# EAGLE board CT_schematic (EAGLE 7.6.0)

Size 147.92 x 80 mm. Coordinates in mm from the lower left corner, seen from the top.
Outline: 47.92,0 147.92,0 147.92,80 47.92,80 47.92,0
Copper layers (1*16): Top 0.035mm / dielectric 1.5mm / Bottom 0.035mm
Design rules "default": minimum track width 10mil, minimum drill 24mil, track to track 8mil, track to pad 8mil, pad to pad 8mil, via to via 8mil, smd to smd 8mil, copper to edge 40mil, drill to drill 8mil, minimum pad ring 10mil, minimum via ring 8mil, stop-mask expansion 4mil, vias tented up to drill 0mil, thermal gap 10mil

## Footprints (pad centres in the part's own frame; a part is rotated, then mirrored left to right if it is on the bottom)
C0603 = smd 0.8 x 0.8: 1 -0.762,0; 2 0.762,0
C0402 = smd 0.5 x 0.5: 1 -0.508,0; 2 0.508,0
C0805 = smd 1.2 x 1.3: 1 -1.016,0; 2 1.016,0
C1210 = smd 1.2 x 2.5: 1 -1.524,0; 2 1.524,0
EXV-9H = smd 3.505 x 1.676: 1 -2.857,0; 2 2.857,0
PJ-037B_PACKAGE = drill 3.7 square: 1 12,0 | drill 3.2 square: 2 6,0
R0603 = smd 0.8 x 0.8: 1 -0.762,0; 2 0.762,0
WLCSP72 = smd 0.25 x 0.25: A1 -1.597,1.597; A2 -1.201,1.597; A3 -0.794,1.597; A4 -0.397,1.597; A5 0,1.597; A6 0.407,1.597; A7 0.804,1.588; A8 1.201,1.597; A9 1.607,1.597; B1 -1.597,1.201; B2 -1.201,1.201; B3 -0.794,1.201; B4 -0.397,1.201; B5 0,1.201; B6 0.407,1.201; B7 0.804,1.201; B8 1.201,1.201; B9 1.607,1.201; C1 -1.597,0.804; C2 -1.201,0.804; C3 -0.794,0.804; C4 -0.397,0.804; C5 0,0.804; C6 0.407,0.804; C7 0.804,0.804; C8 1.201,0.804; C9 1.607,0.804; D1 -1.597,0.397; D2 -1.201,0.397; D3 -0.794,0.397; D7 0.804,0.397; D8 1.201,0.397; D9 1.607,0.397; E1 -1.597,0; E2 -1.201,0; E3 -0.794,0; E7 0.804,0; E8 1.201,0; E9 1.607,0; F1 -1.597,-0.407; F2 -1.201,-0.407; F3 -0.794,-0.407; F7 0.804,-0.407; F8 1.201,-0.407; F9 1.607,-0.407; G1 -1.597,-0.804; G2 -1.201,-0.804; G3 -0.794,-0.804; G4 -0.397,-0.804; G5 0,-0.804; G6 0.407,-0.804; G7 0.804,-0.804; G8 1.201,-0.804; G9 1.607,-0.804; H1 -1.597,-1.201; H2 -1.201,-1.201; H3 -0.794,-1.201; H4 -0.397,-1.201; H5 0,-1.201; H6 0.407,-1.201; H7 0.804,-1.201; H8 1.201,-1.201; H9 1.607,-1.201; J1 -1.597,-1.607; J2 -1.201,-1.607; J3 -0.794,-1.607; J4 -0.397,-1.607; J5 0,-1.607; J6 0.407,-1.607; J7 0.804,-1.607; J8 1.201,-1.607; J9 1.607,-1.607
SSOP-28 = smd 1.5 x 0.4: 1 -3.625,4.225; 2 -3.625,3.575; 3 -3.625,2.925; 4 -3.625,2.275; 5 -3.625,1.625; 6 -3.625,0.975; 7 -3.625,0.325; 8 -3.625,-0.325; 9 -3.625,-0.975; 10 -3.625,-1.625; 11 -3.625,-2.275; 12 -3.625,-2.925; 13 -3.625,-3.575; 14 -3.625,-4.225; 15 3.625,-4.225; 16 3.625,-3.575; 17 3.625,-2.925; 18 3.625,-2.275; 19 3.625,-1.625; 20 3.625,-0.975; 21 3.625,-0.325; 22 3.625,0.325; 23 3.625,0.975; 24 3.625,1.625; 25 3.625,2.275; 26 3.625,2.925; 27 3.625,3.575; 28 3.625,4.225
FCI_10118193-0001LF = smd 0.4 x 1.35: 1 -1.3,2.675; 2 -0.65,2.675; 3 0,2.675; 4 0.65,2.675; 5 1.3,2.675 | smd 1.6 x 1.4: 6 -3.2,2.45; 7 3.2,2.45 | smd 1.9 x 1.9: 8 -1.2,0; 9 1.2,0 | hole 0.5: -3.3,0; 3.3,0
TDFN-8/6MM = smd 0.3 x 0.75: 1 0,0; 2 0.5,0; 3 1,0; 4 1.5,0; 5 1.5,3; 6 1,3; 7 0.5,3; 8 0,3
TFBGA-153 = smd 0.3 x 0.3: A1 -3.25,3.25; A2 -2.75,3.25; A3 -2.25,3.25; A4 -1.75,3.25; A5 -1.25,3.25; A6 -0.75,3.25; A7 -0.25,3.25; A8 0.25,3.25; A9 0.75,3.25; A10 1.25,3.25; A11 1.75,3.25; A12 2.25,3.25; A13 2.75,3.25; A14 3.25,3.25; B1 -3.25,2.75; B2 -2.75,2.75; B3 -2.25,2.75; B4 -1.75,2.75; B5 -1.25,2.75; B6 -0.75,2.75; B7 -0.25,2.75; B8 0.25,2.75; B9 0.75,2.75; B10 1.25,2.75; B11 1.75,2.75; B12 2.25,2.75; B13 2.75,2.75; B14 3.25,2.75; C1 -3.25,2.25; C2 -2.75,2.25; C3 -2.25,2.25; C4 -1.75,2.25; C5 -1.25,2.25; C6 -0.75,2.25; C7 -0.25,2.25; C8 0.25,2.25; C9 0.75,2.25; C10 1.25,2.25; C11 1.75,2.25; C12 2.25,2.25; C13 2.75,2.25; C14 3.25,2.25; D1 -3.25,1.75; D2 -2.75,1.75; D3 -2.25,1.75; D4 -1.75,1.75; D12 2.25,1.75; D13 2.75,1.75; D14 3.25,1.75; E1 -3.25,1.25; E2 -2.75,1.25; E3 -2.25,1.25; E5 -1.25,1.25; E6 -0.75,1.25; E7 -0.25,1.25; E8 0.25,1.25; E9 0.75,1.25; E10 1.25,1.25; E12 2.25,1.25; E13 2.75,1.25; E14 3.25,1.25; F1 -3.25,0.75; F2 -2.75,0.75; F3 -2.25,0.75; F5 -1.25,0.75; F10 1.25,0.75; F12 2.25,0.75; F13 2.75,0.75; F14 3.25,0.75; G1 -3.25,0.25; G2 -2.75,0.25; G3 -2.25,0.25; G5 -1.25,0.25; G10 1.25,0.25; G12 2.25,0.25; G13 2.75,0.25; G14 3.25,0.25; H1 -3.25,-0.25; H2 -2.75,-0.25; H3 -2.25,-0.25; H5 -1.25,-0.25; H10 1.25,-0.25; H12 2.25,-0.25; H13 2.75,-0.25; H14 3.25,-0.25; J1 -3.25,-0.75; J2 -2.75,-0.75; J3 -2.25,-0.75; J5 -1.25,-0.75; J10 1.25,-0.75; J12 2.25,-0.75; J13 2.75,-0.75; J14 3.25,-0.75; K1 -3.25,-1.25; K2 -2.75,-1.25; K3 -2.25,-1.25; K5 -1.25,-1.25; K6 -0.75,-1.25; K7 -0.25,-1.25; K8 0.25,-1.25; K9 0.75,-1.25; K10 1.25,-1.25; K12 2.25,-1.25; K13 2.75,-1.25; K14 3.25,-1.25; L1 -3.25,-1.75; L2 -2.75,-1.75; L3 -2.25,-1.75; L12 2.25,-1.75; L13 2.75,-1.75; L14 3.25,-1.75; M1 -3.25,-2.25; M2 -2.75,-2.25; M3 -2.25,-2.25; M4 -1.75,-2.25; M5 -1.25,-2.25; M6 -0.75,-2.25; M7 -0.25,-2.25; M8 0.25,-2.25; M9 0.75,-2.25; M10 1.25,-2.25; M11 1.75,-2.25; M12 2.25,-2.25; M13 2.75,-2.25; M14 3.25,-2.25; N1 -3.25,-2.75; N2 -2.75,-2.75; N3 -2.25,-2.75; N4 -1.75,-2.75; N5 -1.25,-2.75; N6 -0.75,-2.75; N7 -0.25,-2.75; N8 0.25,-2.75; N9 0.75,-2.75; N10 1.25,-2.75; N11 1.75,-2.75; N12 2.25,-2.75; N13 2.75,-2.75; N14 3.25,-2.75; P1 -3.25,-3.25; P2 -2.75,-3.25; P3 -2.25,-3.25; P4 -1.75,-3.25; P5 -1.25,-3.25; P6 -0.75,-3.25; P7 -0.25,-3.25; P8 0.25,-3.25; P9 0.75,-3.25; P10 1.25,-3.25; P11 1.75,-3.25; P12 2.25,-3.25; P13 2.75,-3.25; P14 3.25,-3.25
SOT143B = smd 1 x 0.7: 1 -0.75,-1 | smd 0.6 x 0.7: 2 0.95,-1; 3 0.95,1; 4 -0.95,1
ABS07-32.768KHZ-7-T = smd 1.1 x 2.4: 1 -2.5,0; 2 0,0
ASFL1 = smd 1.7 x 1.5: 1 -1.27,-1.1; 2 1.27,-1.1; 3 1.27,1.1; 4 -1.27,1.1
WSON-8 = smd 0.3 x 0.6: 1 -0.75,0; 2 0.05,0; 3 0.85,0; 4 1.65,0; 5 1.65,3.8; 6 0.85,3.8; 7 0.05,3.8; 8 -0.75,3.8 | smd 3 x 2.6: PAD 0.45,1.9
SON-6 = smd 0.55 x 0.3: 1 -0.355,0.5 | smd 0.52 x 0.3: 2 -0.37,0; 3 -0.37,-0.5; 4 0.37,-0.5; 5 0.37,0; 6 0.37,0.5
SW_4-1437565-2 = smd 1.4 x 2.1: 1 -2.23,4.55; 2 -2.23,-4.55; 3 2.23,4.55; 4 2.23,-4.55
LGM67K-G1J2-24-Z = smd 0.8 x 1.4: A -2,0; C 0,0
NC7SZ125M5X = smd 1.3 x 0.7: 1 -1.3,0.95; 2 -1.3,0; 3 -1.3,-0.95; 4 1.3,-0.95; 5 1.3,0.95

## Placement (x,y rotation side)
C1  1e-06  [C0603]  -11.77,63.5 0 top  (outside the outline)
C2  1e-07  [C0603]  -15.58,63.5 0 top  (outside the outline)
C3  1e-07  [C0603]  -19.39,63.5 0 top  (outside the outline)
C4  1e-07  [C0603]  -23.2,63.5 0 top  (outside the outline)
C5  1e-07  [C0603]  32.68,68.58 0 top
C6  1e-07  [C0603]  28.87,68.58 0 top
C7  4.7e-06  [C0603]  3.47,63.5 0 top
C8  1e-07  [C0603]  25.06,68.58 0 top
C9  1e-07  [C0603]  21.25,68.58 0 top
C10  1e-07  [C0603]  17.44,68.58 0 top
C11  1e-08  [C0603]  13.63,68.58 0 top
C12  1e-06  [C0603]  9.82,68.58 0 top
C13  1e-11  [C0402]  25.06,73.66 0 top
C14  1e-11  [C0402]  21.25,73.66 0 top
C15  1e-07  [C0402]  17.44,73.66 0 top
C16  4.7e-06  [C0805]  -24.47,50.8 0 top  (outside the outline)
C17  1e-07  [C0402]  13.63,73.66 0 top
C18  1e-07  [C0402]  9.82,73.66 0 top
C19  1e-08  [C0402]  6.01,73.66 0 top
C20  1e-08  [C0402]  2.2,73.66 0 top
C21  1e-07  [C0402]  -1.61,73.66 0 top
C22  2.2e-06  [C0603]  -0.34,63.5 0 top
C23  2.2e-06  [C0603]  -4.15,63.5 0 top  (outside the outline)
C24  1e-07  [C0402]  -5.42,73.66 0 top  (outside the outline)
C25  1e-07  [C0402]  -9.23,73.66 0 top  (outside the outline)
C26  2.2e-06  [C0603]  -7.96,63.5 0 top  (outside the outline)
C27  1e-08  [C0402]  -13.04,73.66 0 top  (outside the outline)
C28  1e-08  [C0402]  -16.85,73.66 0 top  (outside the outline)
C29  1e-08  [C0402]  -20.66,73.66 0 top  (outside the outline)
C30  1e-05  [C1210]  -0.34,52.07 0 top
C31  1e-05  [C1210]  -6.69,52.07 0 top  (outside the outline)
C32  1e-07  [C0402]  -24.47,73.66 0 top  (outside the outline)
C33  0.0001  [EXV-9H]  -6.69,43.18 0 top  (outside the outline)
C34  0.0001  [EXV-9H]  -18.12,43.18 0 top  (outside the outline)
C35  1e-08  [C0402]  32.68,78.74 0 top
C36  1e-08  [C0402]  28.87,78.74 0 top
J1  PJ-037B  [PJ-037B_PACKAGE]  -7.96,7.62 0 top
R2  1000.0  [R0603]  6.01,68.58 0 top
R4  4700.0  [R0603]  2.2,68.58 0 top
R5  4700.0  [R0603]  -1.61,68.58 0 top
R6  2200.0  [R0603]  -5.42,68.58 0 top  (outside the outline)
R7  2200.0  [R0603]  -9.23,68.58 0 top  (outside the outline)
R8  2200.0  [R0603]  -13.04,68.58 0 top  (outside the outline)
R9  2200.0  [R0603]  -16.85,68.58 0 top  (outside the outline)
R10  10000.0  [R0603]  17.44,58.42 0 top
R11  4700.0  [R0603]  -20.66,68.58 0 top  (outside the outline)
R12  10000.0  [R0603]  12.36,58.42 0 top
R13  10000.0  [R0603]  7.28,58.42 0 top
R14  34000.0  [R0603]  2.2,58.42 0 top
R15  34000.0  [R0603]  -2.88,58.42 0 top
R16  34000.0  [R0603]  -7.96,58.42 0 top  (outside the outline)
R17  34000.0  [R0603]  -13.04,58.42 0 top  (outside the outline)
R18  34000.0  [R0603]  -18.12,58.42 0 top  (outside the outline)
R19  34000.0  [R0603]  -23.2,58.42 0 top  (outside the outline)
R20  34000.0  [R0603]  32.68,63.5 0 top
R21  34000.0  [R0603]  27.6,63.5 0 top
R22  34000.0  [R0603]  22.52,63.5 0 top
R23  34000.0  [R0603]  17.44,63.5 0 top
R24  100000.0  [R0603]  32.68,58.42 0 top
R25  2231.0  [R0603]  -24.47,68.58 0 top  (outside the outline)
R26  1000.0  [R0603]  32.68,73.66 0 top
R27  10000.0  [R0603]  12.36,63.5 0 top
R28  10000.0  [R0603]  7.28,63.5 0 top
R29  9100.0  [R0603]  28.87,73.66 0 top
R30  680000.0  [R0603]  27.6,58.42 0 top
R31  120000.0  [R0603]  22.52,58.42 0 top
U1  STM32L476JGY7  [WLCSP72]  2.2,44.45 0 top
U2  FT232RL-REEL  [SSOP-28]  12.36,7.62 0 top
U3  10118193-0001LF  [FCI_10118193-0001LF]  28.87,43.18 0 top
U4  24AA01T-I/MNY  [TDFN-8/6MM]  4.74,21.59 0 top
U5  24AA02T-I/MNY  [TDFN-8/6MM]  -9.23,21.59 0 top  (outside the outline)
U6  mtfc4gmcdm  [TFBGA-153]  27.6,8.89 0 top
U7  10118193-0001LF  [FCI_10118193-0001LF]  18.71,43.18 0 top
U8  prtr5v0u2ax  [SOT143B]  16.17,78.74 0 top
U9  ABS07-32.768KHZ-7-T  [ABS07-32.768KHZ-7-T]  19.98,52.07 0 top
U10  ASFL1-12MHZ-NCS  [ASFL1]  0.93,34.29 0 top
U11  ASFL1-25MHZ-NCS  [ASFL1]  -15.58,34.29 0 top  (outside the outline)
U12  LP3878SDX-ADJ/NOPB  [WSON-8]  17.44,33.02 0 top
U13  TPS3895ADRYR  [SON-6]  12.36,77.47 0 top
U14  4-1437565-2  [SW_4-1437565-2]  19.98,24.13 0 top
U15  Q65110A2395  [LGM67K-G1J2-24-Z]  11.09,52.07 0 top
U16  nc7sz125m5x  [NC7SZ125M5X]  -11.77,50.8 0 top  (outside the outline)
U17  nc7sz125m5x  [NC7SZ125M5X]  -18.12,50.8 0 top  (outside the outline)

## Library data of the parts
C1-C36 J1 R2 R4-R31 U1-U17 = circuit_tree

## Nets
CLK_CRYSTAL_U1_C8: C13.1 U1.C8 U9.1
CLK_CRYSTAL_U1_C9: C14.1 U1.C9 U9.2
CLK_U1_D9: U1.D9 U11.3
CLK_U2_27: U2.27 U10.3
GND: C1.2 C2.2 C3.2 C4.2 C5.2 C6.2 C7.2 C8.2 C9.2 C10.2 C11.2 C12.2 C13.2 C14.2 C15.2 C16.2 C17.2 C18.2 C19.2 C20.2 C21.2 C22.2 C23.2 C24.2 C25.2 C26.2 C27.2 C28.2 C29.2 C30.2 C31.2 C32.2 C33.2 C34.2 C35.2 C36.2 J1.2 R2.2 R10.2 R13.2 R26.2 R29.2 R31.2 U1.A8 U1.B1 U1.G9 U1.J2 U1.J9 U2.7 U2.18 U2.21 U2.25 U2.26 U3.5 U3.6 U3.7 U3.8 U3.9 U4.4 U4.7 U5.4 U5.7 U6.C4 U6.E7 U6.G5 U6.H10 U6.K8 U6.N2 U6.N5 U6.P4 U6.P6 U7.5 U7.6 U7.7 U7.8 U7.9 U8.1 U10.2 U11.2 U12.3 U12.PAD U13.2 U15.C U16.1 U16.3 U17.1 U17.3
NET_U1_A5: R6.1 U1.A5 U4.6
NET_U1_A7: R7.1 U1.A7 U4.5
NET_U1_D7: R10.1 U1.D7
NET_U1_E9: R5.1 U1.E9 U17.4
NET_U1_G2: R9.1 U1.G2 U5.5
NET_U1_H3: R8.1 U1.H3 U5.6
NET_U1_J6: U15.A
NET_U1_J7: U14.3 U14.4
NET_U2_14: R12.1 U2.14
NET_U2_17: C17.1 U2.17
NET_U2_19: R13.1 U2.19
NET_U3_1: R11.1 U3.1
NET_U3_2: U2.16 U3.2
NET_U3_3: U2.15 U3.3
NET_U3_19: R11.2
NET_U6_C2: C23.1 C24.1 U6.C2
NET_U6_K5: R4.1 U6.K5 U16.4
NET_U12_1: C29.1 U12.1
NET_U12_6: R25.2 R26.1 U12.6
NET_U12_8: R24.1 U12.8
NET_U13_1: R28.1 R29.1 U13.1
NET_U13_3: R30.2 R31.1 U13.3
NET_U13_4: R27.1 U13.4 U16.2 U17.2
NET_U14_1: R2.1 U14.1 U14.2
PROC_LPUART1_CTS: U1.H2 U2.3
PROC_LPUART1_RTS: U1.H1 U2.11
PROC_LPUART1_RX: U1.F9 U2.1
PROC_LPUART1_TX: U1.F8 U2.5
PROC_SDMMC1_CK: R23.1 U1.B3 U6.M6
PROC_SDMMC1_CMD: R22.1 U1.A3 U6.M5
PROC_SDMMC1_D0: R14.1 U1.F2 U6.A3
PROC_SDMMC1_D1: R15.1 U1.E1 U6.A4
PROC_SDMMC1_D2: R16.1 U1.D3 U6.A5
PROC_SDMMC1_D3: R17.1 U1.C3 U6.B2
PROC_SDMMC1_D4: R18.1 U1.E7 U6.B3
PROC_SDMMC1_D5: R19.1 U1.E8 U6.B4
PROC_SDMMC1_D6: R20.1 U1.F3 U6.B5
PROC_SDMMC1_D7: R21.1 U1.F1 U6.B6
PROC_USB_OTG_FS_DM: U1.D1 U7.2 U8.3
PROC_USB_OTG_FS_DP: U1.C1 U7.3 U8.2
PROC_USB_OTG_FS_VBUS: U1.E3 U7.1 U8.4
VCC_S1_14V6: C30.1 C33.1 C34.1 J1.1 R24.2 U12.4
VCC_TIER1_3V3: C1.1 C2.1 C3.1 C4.1 C5.1 C6.1 C7.1 C8.1 C9.1 C10.1 C11.1 C12.1 C15.1 C16.1 C18.1 C19.1 C20.1 C21.1 C22.1 C25.1 C26.1 C27.1 C28.1 C31.1 C32.1 C35.1 C36.1 R4.2 R5.2 R6.2 R7.2 R8.2 R9.2 R12.2 R14.2 R15.2 R16.2 R17.2 R18.2 R19.2 R20.2 R21.2 R22.2 R23.2 R25.1 R27.2 R28.2 R30.1 U1.A1 U1.A9 U1.B6 U1.B9 U1.G8 U1.H9 U1.J1 U1.J8 U2.4 U2.20 U4.8 U5.8 U6.C6 U6.E6 U6.F5 U6.J10 U6.K9 U6.M4 U6.N4 U6.P3 U6.P5 U10.4 U11.4 U12.5 U13.6 U16.5 U17.5

## Tracks (layer width: path | path; a pad name or v marks a point on that pad's centre or on a via)
CLK_CRYSTAL_U1_C8  (2 unrouted)
CLK_CRYSTAL_U1_C9  (2 unrouted)
CLK_U1_D9  (1 unrouted)
CLK_U2_27  (1 unrouted)
GND  (86 unrouted)
NET_U1_A5  (2 unrouted)
NET_U1_A7  (2 unrouted)
NET_U1_D7  (1 unrouted)
NET_U1_E9  (2 unrouted)
NET_U1_G2  (2 unrouted)
NET_U1_H3  (2 unrouted)
NET_U1_J7  (1 unrouted)
NET_U2_14  (1 unrouted)
NET_U2_17  (1 unrouted)
NET_U2_19  (1 unrouted)
NET_U3_1  (1 unrouted)
NET_U3_2  (1 unrouted)
NET_U3_3  (1 unrouted)
NET_U6_C2  (2 unrouted)
NET_U6_K5  (2 unrouted)
NET_U12_1  (1 unrouted)
NET_U12_6  (2 unrouted)
NET_U12_8  (1 unrouted)
NET_U13_1  (2 unrouted)
NET_U13_3  (2 unrouted)
NET_U13_4  (3 unrouted)
NET_U14_1  (2 unrouted)
PROC_LPUART1_CTS  (1 unrouted)
PROC_LPUART1_RTS  (1 unrouted)
PROC_LPUART1_RX  (1 unrouted)
PROC_LPUART1_TX  (1 unrouted)
PROC_SDMMC1_CK  (2 unrouted)
PROC_SDMMC1_CMD  (2 unrouted)
PROC_SDMMC1_D0  (2 unrouted)
PROC_SDMMC1_D1  (2 unrouted)
PROC_SDMMC1_D2  (2 unrouted)
PROC_SDMMC1_D3  (2 unrouted)
PROC_SDMMC1_D4  (2 unrouted)
PROC_SDMMC1_D5  (2 unrouted)
PROC_SDMMC1_D6  (2 unrouted)
PROC_SDMMC1_D7  (2 unrouted)
PROC_USB_OTG_FS_DM  (2 unrouted)
PROC_USB_OTG_FS_DP  (2 unrouted)
PROC_USB_OTG_FS_VBUS  (2 unrouted)
VCC_S1_14V6  (5 unrouted)
VCC_TIER1_3V3  (74 unrouted)